# EAGLE board 2015-11-14_12-31-03 (EAGLE 7.0.0)

Size 100 x 80 mm. Coordinates in mm from the lower left corner, seen from the top.
Outline: 0,0 100,0 100,80 0,80 0,0
Copper layers (1*16): Top 0.035mm / dielectric 1.5mm / Bottom 0.035mm
Design rules "default": minimum track width 10mil, minimum drill 24mil, track to track 8mil, track to pad 8mil, pad to pad 8mil, via to via 8mil, smd to smd 8mil, copper to edge 40mil, drill to drill 8mil, minimum pad ring 10mil, minimum via ring 8mil, stop-mask expansion 4mil, vias tented up to drill 0mil, thermal gap 10mil

## Footprints (pad centres in the part's own frame; a part is rotated, then mirrored left to right if it is on the bottom)
1206_190 = drill 0: 1 -1.499,0; 2 1.499,0
0805 = drill 0: 1 -0.902,0; 2 0.902,0
WB_GND = drill 0: 1 0,0
WB_CURRENT_LOAD = drill 0: 1 0,0; 2 0,0
MLP2520K-S = drill 0: 1 -1.048,0; 2 1.048,0
R-PVSON-N14 = drill 0: 1 -1.25,1.5; 2 -1.25,1; 3 -1.25,0.5; 4 -1.25,0; 5 -1.25,-0.5; 6 -1.25,-1; 7 -1.25,-1.5; 8 1.25,-1.5; 9 1.25,-1; 10 1.25,-0.5; 11 1.25,0; 12 1.25,0.5; 13 1.25,1; 14 1.25,1.5; 15 0,0
WB_BATTERY = drill 0: 1 0,0; 2 0,0

## Placement (x,y rotation side)
CIN  22uF  [1206_190]  -15.24,6.35 0 top  (outside the outline)
COUT  47uF  [1206_190]  -15.24,8.89 0 top  (outside the outline)
CVINA  100nF  [0805]  -15.24,13.97 0 top  (outside the outline)
GND  WB_GND  [WB_GND]  -19.05,13.97 0 top  (outside the outline)
IOUT  WB_CURRENT_LOAD  [WB_CURRENT_LOAD]  -13.97,16.51 0 top  (outside the outline)
L1  1uH  [MLP2520K-S]  -15.24,11.43 0 top  (outside the outline)
U1  TPS63021DSJR  [R-PVSON-N14]  -15.24,2.54 0 top  (outside the outline)
VIN  WB_BATTERY  [WB_BATTERY]  -16.51,16.51 0 top  (outside the outline)

## Library data of the parts
CIN = AcceleratedDesigns_Lib; CAP: 2.2E-5; ESR: 0.0; IRMS: 0.0; MANUFACTURER_NAME: MuRata; MANUFACTURER_PART_NUMBER: GRM31CR61A226KE19L; VDC: 10.0; VENDOR: MuRata
COUT = AcceleratedDesigns_Lib; CAP: 4.7E-5; ESR: 0.0030; IRMS: 0.0; MANUFACTURER_NAME: MuRata; MANUFACTURER_PART_NUMBER: GRM31CR60J476ME19L; VDC: 6.3; VENDOR: MuRata
CVINA = AcceleratedDesigns_Lib; CAP: 1.0E-7; ESR: 0.28; IRMS: 0.0; MANUFACTURER_NAME: AVX; MANUFACTURER_PART_NUMBER: 08053C104KAT2A; VDC: 25.0; VENDOR: AVX
GND = AcceleratedDesigns_Lib; MANUFACTURER_NAME: WB_GND; MANUFACTURER_PART_NUMBER: WB_GND; POWERPORTTYPE: POWER_GROUND
IOUT = AcceleratedDesigns_Lib; MANUFACTURER_NAME: WB_CURRENT_LOAD; MANUFACTURER_PART_NUMBER: WB_CURRENT_LOAD; POWERPORTTYPE: POWER_GROUND
L1 = AcceleratedDesigns_Lib; MANUFACTURER_NAME: TDK; MANUFACTURER_PART_NUMBER: 'MLP2520K1R0ST'; VENDOR: Gimme a name
U1 = AcceleratedDesigns_Lib; DATASHEET_URL: http://www.ti.com/lit/ds/symlink/tps63020.pdf; FREQUENCY: 2400000.0; IMAX: 3.0; MANUFACTURER_NAME: Texas Instruments; MANUFACTURER_PART_NUMBER: TPS63021DSJR; MKTG_PACKAGE: TPS63020; NSID: TPS63021DSJR; PACKAGE: TPS63020; VENDOR: Texas Instruments
VIN = AcceleratedDesigns_Lib; MANUFACTURER_NAME: WB_BATTERY; MANUFACTURER_PART_NUMBER: WB_BATTERY; POWERPORTTYPE: POWER_GROUND

## Nets
0: CIN.2 COUT.2 CVINA.2 GND.1 IOUT.2 U1.2 U1.13 U1.15 VIN.2
1: COUT.1 IOUT.1 U1.3 U1.4 U1.5
2: L1.2 U1.8 U1.9
3: CVINA.1 U1.1 U1.12
4: CIN.1 U1.10 U1.11 VIN.1
5: L1.1 U1.6 U1.7

## Tracks (layer width: path | path; a pad name or v marks a point on that pad's centre or on a via)
0  (8 unrouted)
1  (4 unrouted)
2  (2 unrouted)
3  (2 unrouted)
4  (3 unrouted)
5  (2 unrouted)